# Altium PCB pcb_ttl_net_9120.PcbDoc
Units mil, origin at the board's own origin, x right, y up, seen from the top; angles counter-clockwise.
Board outline 1090 x 660 mil, 4 copper layers (Top Layer, GND02, PWR03, Bottom Layer), stack 23.756 mil thick; 24 components, 34 nets, 107 pads, 114 vias.
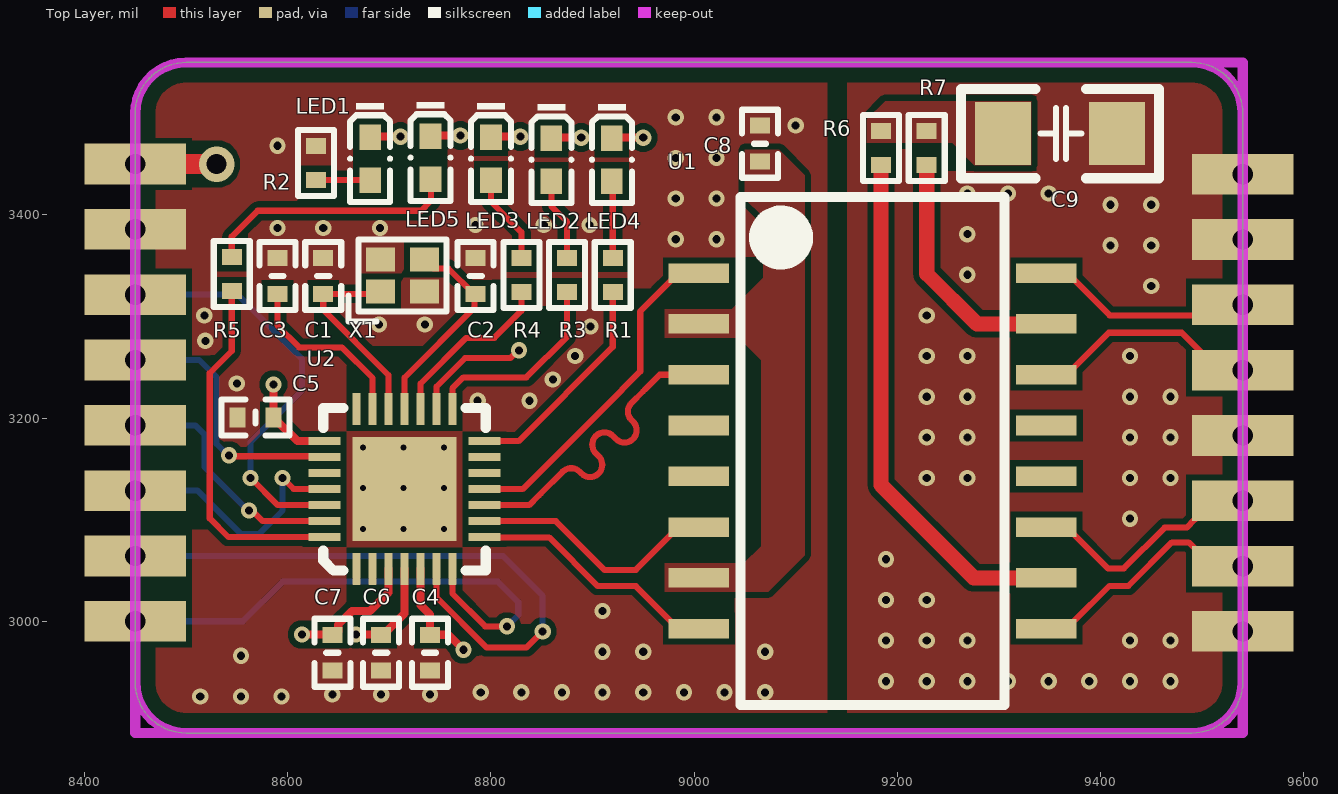
[diagram p0: Top Layer view]
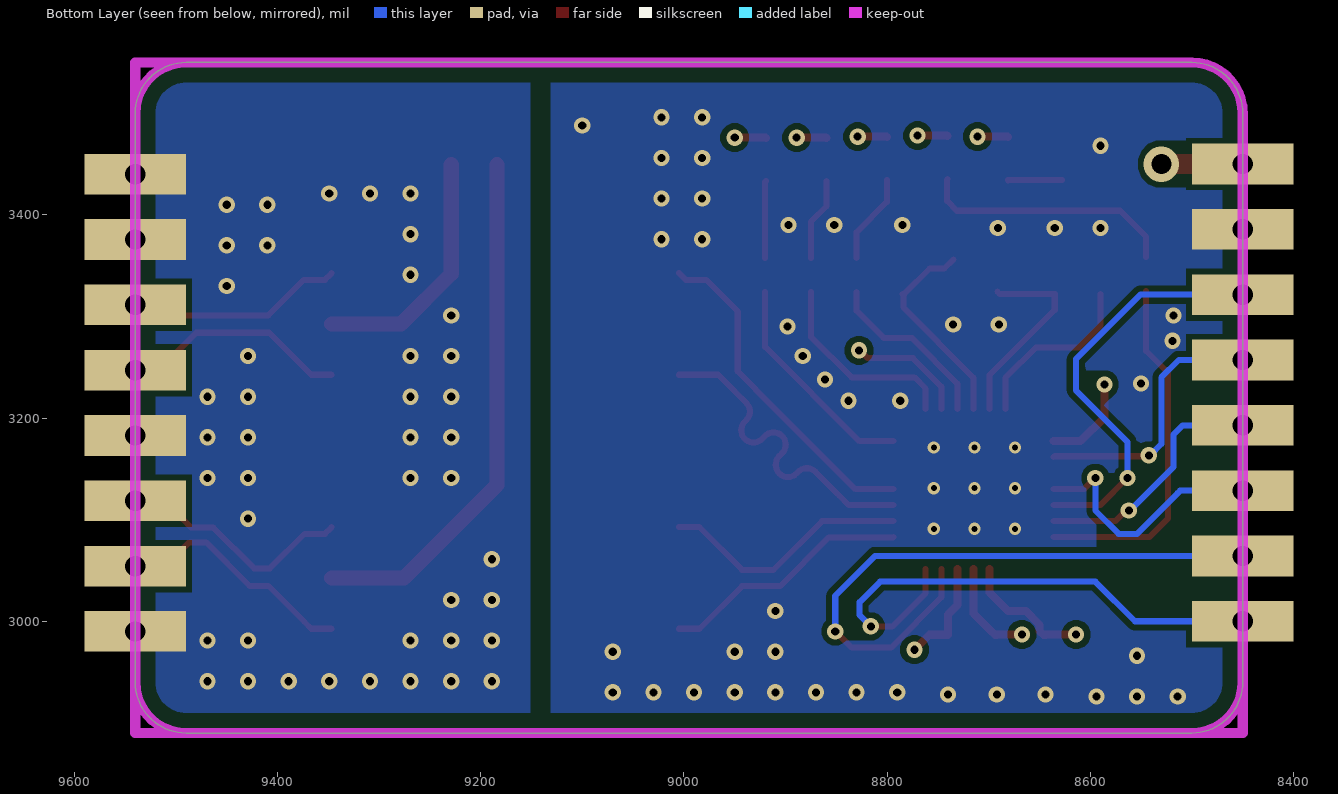
[diagram p1: Bottom Layer view, seen from below]
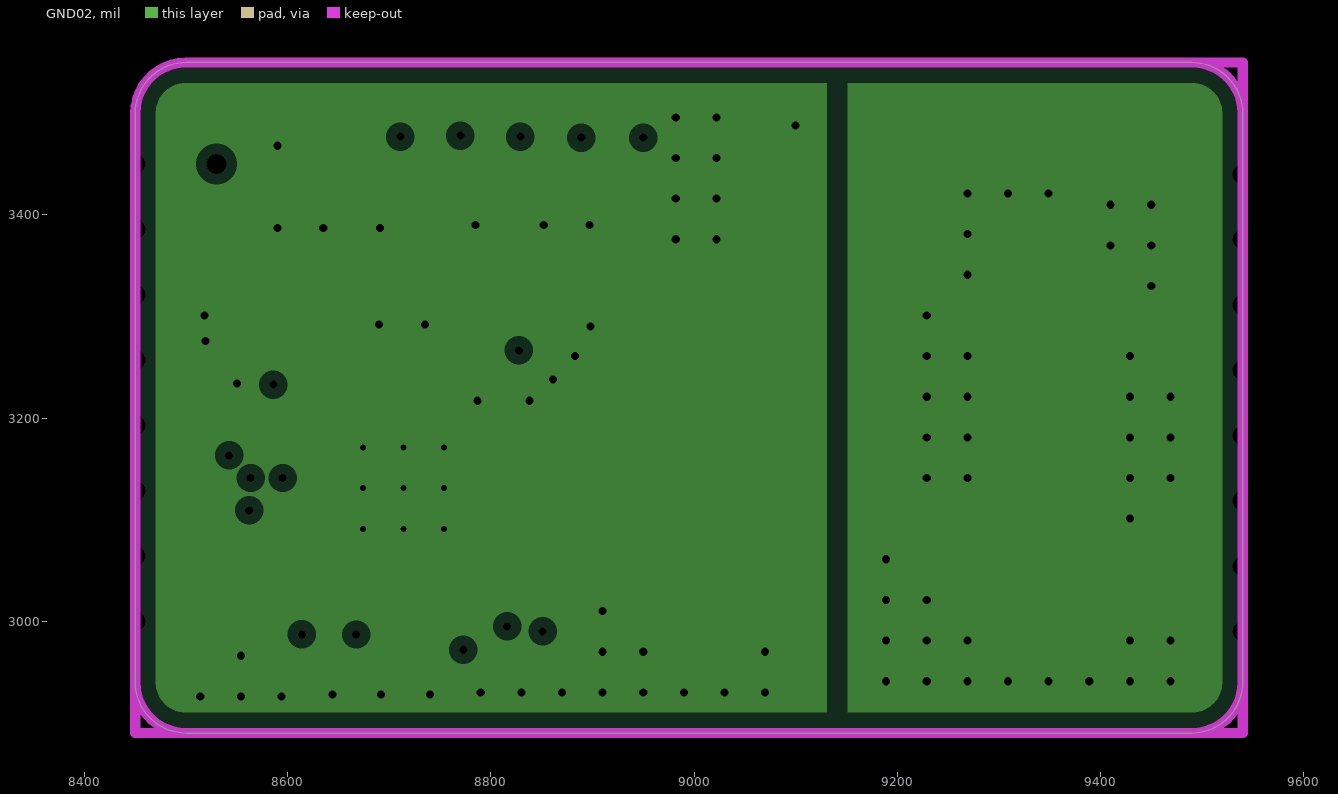
[diagram p2: GND02, clearances drawn from the general rule]
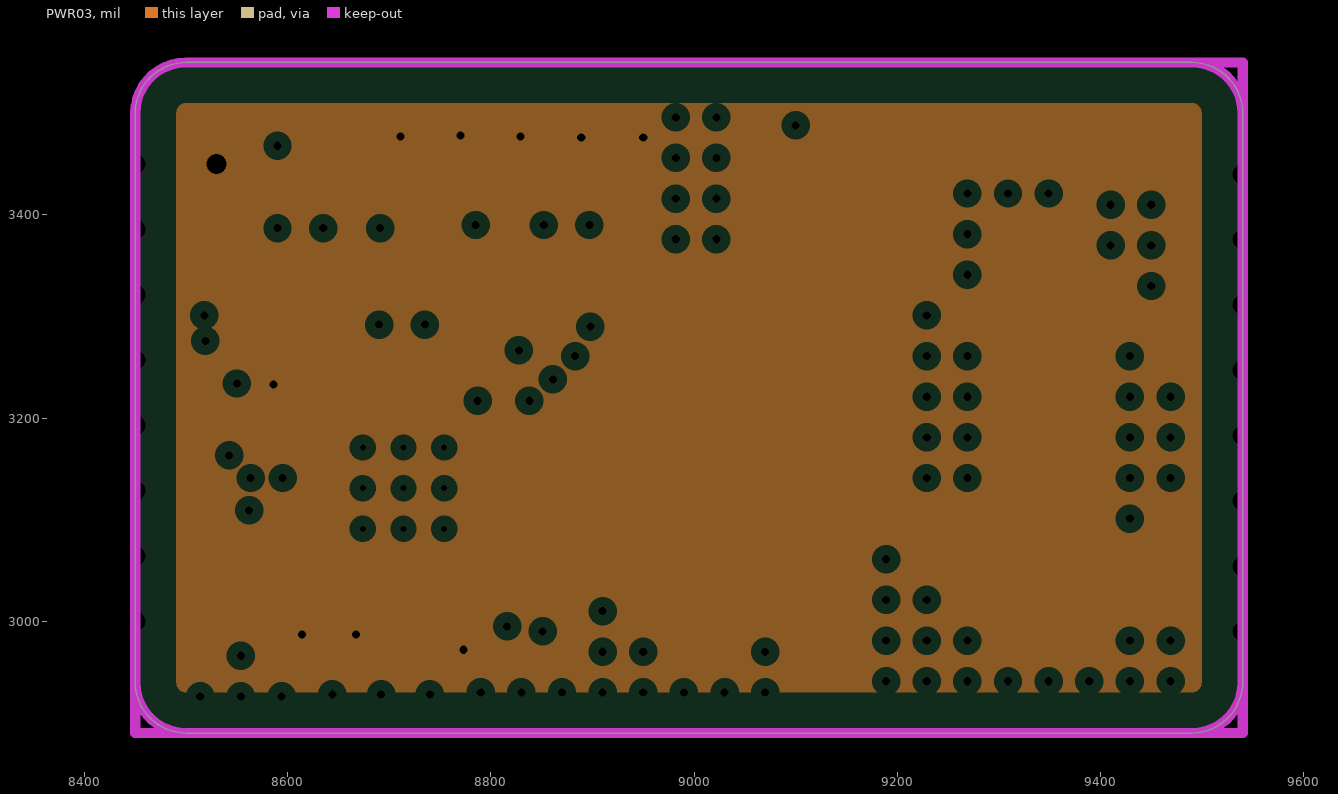
[diagram p3: PWR03, clearances drawn from the general rule]
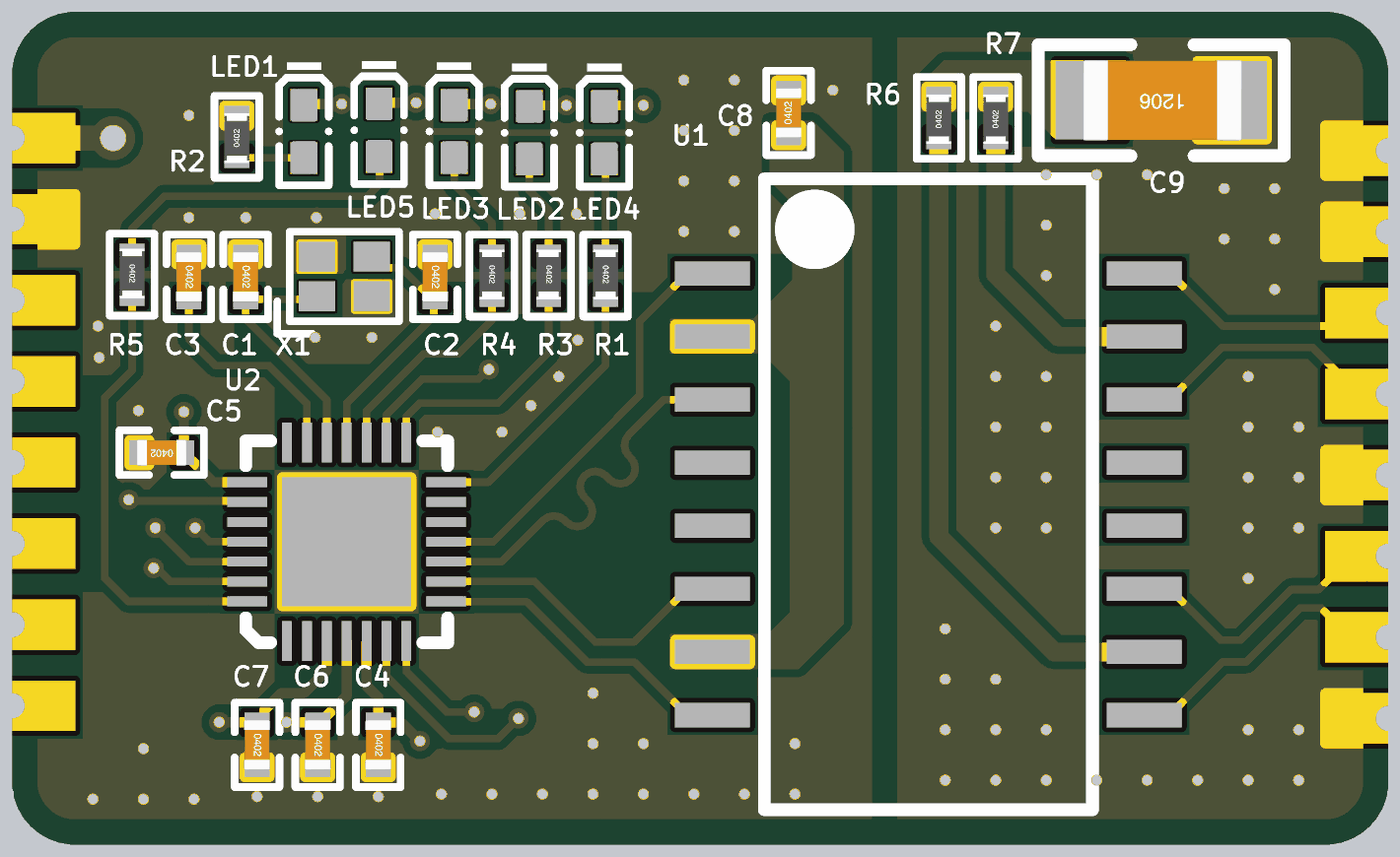
[diagram p4: 3D render of the assembled board from above, using the file's embedded part models]

## Layer stack, top to bottom
Top Solder: solder mask 0.4, Solder Resist, Dk 3.5
Top Layer: signal copper 1.4
Dielectric 2: prepreg 2.8, PP-006, Dk 4.1
GND02: plane copper 1.378, net GND
Dielectric 3: prepreg 2.8, PP-006, Dk 4.1
PWR03: plane copper 1.378, net 3V3
Dielectric 1: dielectric 12.6, FR-4, Dk 4.8
Bottom Layer: signal copper 1.4
Bottom Solder: solder mask 0.4, Solder Resist, Dk 3.5

## Board outline
8450,2940 8450,3500 cw(c8500,3500) 8500,3550 9490,3550 cw(c9490,3500) 9540,3500 9540,2940 cw(c9490,2940) 9490,2890 8500,2890 cw(c8500,2940)

## Design rules (kind name [scope] priority, off if disabled: settings)
Clearance [All] p1: gap=6 ignorepadtopadclearanceinfootprint=TRUE
DiffPairsRouting [All] p1: maxlimit=10 minlimit=8 mostfreqgap=8 toplayer_minwidth=1 toplayer_maxwidth=100 toplayer_prefwidth=4 bottomlayer_minwidth=1 bottomlayer_maxwidth=100 bottomlayer_prefwidth=4 maxuncoupledlength=500
PlaneClearance [All] p1: clearance=10
PlaneConnect [All] p1: planeconnectstyle=Direct reliefexpansion=20 reliefentries=4 reliefconductorwidth=10 reliefairgap=10
PolygonConnect [All] p1: connectstyle=Direct reliefconductorwidth=10 reliefentries=4 polygonreliefangle="90 Angle" airgapwidth=10
RoutingVias [All] p1: holewidth=8 width=16 viastyle="Through Hole" minholewidth=10 minwidth=10 maxholewidth=100 maxwidth=100
SilkToSilkClearance [All] p1: silktosilkclearance=4
SilkToSolderMaskClearance [IsPad] p1: minsilkscreentomaskgap=4 clearancetoexposedcopper=TRUE
SolderMaskExpansion [All] p1: expansion=4 istentingtop=FALSE
Width [All] p1: maxlimit=100 minlimit=1 preferedwidth=8
25 further rules are at their usual default settings.

## Classes and differential pairs
differential pair INF_ETH_TX: +INF_ETH_TX_P -INF_ETH_TX_N
differential pair INF_ETH_RX: +INF_ETH_RX_P -INF_ETH_RX_N
differential pair CH9120_TX: +CH9120_TX_P -CH9120_TX_N
differential pair CH9120_RX: +CH9120_RX_P -CH9120_RX_N

## Components (designator, comment, footprint, x,y, rotation, side; value= is the part's Value field where it differs from the comment)
C1 "12pF" "C 0402_L" 8635,3340 r270 top
C2 "12pF" "C 0402_L" 8785,3340 r270 top
C3 "1uF" "C 0402_L" 8590,3340 r270 top
C4 "2.2uF" "C 0402_L" 8740,2969 r270 top
C5 "104" "C 0402_L" 8568.46,3200.65 r180 top
C6 "104" "C 0402_L" 8692,2969 r270 top
C7 "104" "C 0402_L" 8644,2969 r270 top
C8 "0.01uF" "C 0402_L" 9065,3470 r90 top
C9 "104" "C 1206_L" 9361.09,3480 r180 top
LED1 "红色" LED-SMD_0402 8680,3455 r270 top
LED2 "红色" LED-SMD_0402 8858.5,3454 r270 top
LED3 "红色" LED-SMD_0402 8799,3455 r270 top
LED4 "红色" LED-SMD_0402 8918,3454 r270 top
LED5 "红色" LED-SMD_0402 8739.5,3456 r270 top
R1 "1K" "R 0402_L" 8920,3341.96 r270 top
R2 "1K" "R 0402_L" 8628,3450 r90 top
R3 "1K" "R 0402_L" 8875,3341.96 r270 top
R4 "1K" "R 0402_L" 8830,3341.96 r270 top
R5 "1K" "R 0402_L" 8545,3342.71 r270 top
R6 "1K" "R 0402_L" 9184,3465 r90 top
R7 "1K" "R 0402_L" 9229,3465 r90 top
U1 "H1601CE" XFMR-SMD_16P-L12.7-W6.8-P1.27-LS9.5 9205,3205 r270 top
U2 "CH9120" WQFN-28_L4.0-W4.0-P0.40-BL-EP 8715,3130 r0 top
X1 "XTAL" XTAL-SMD_4P-1612 8715,3340 r0 top

## Footprints (in the part's own frame and the unit in brackets; to place one, negate y for a bottom-side part, rotate by r counter-clockwise, add the part's x,y. Pads: shape width x height; smd on the part's side, far side on the other; paste and mask are expansions set on the pad)
"C 0402_L" [mm] "无极性贴片电容         淘宝ID:黄晶宝石"
  rect 0.4x0.5 smd: 1(-0.45,0) 2(0.45,0)
  silkscreen extent -0.85,-0.45 0.85,0.45, body extent -0.5,-0.26 0.5,0.26, height 0.53
"C 1206_L" [mil] "无极性贴片电容"
  rect 55x62 smd: 1(-55.12,0) 2(57.09,0)
  silkscreen extent -96,-44 98,44, body extent -63,-32 63,32, height 48
LED-SMD_0402 [mm]
  rect 0.636x0.54 smd paste-100 mask+0.051: 1(-0.545,0.029) 2(0.531,0.029)
  silkscreen extent -1.4,-0.51 1.08,0.57
"R 0402_L" [mm] "1/16W贴片电阻     淘宝ID:黄晶宝石"
  rect 0.4x0.5 smd: 1(-0.4,0) 2(0.45,0)
  silkscreen extent -0.8,-0.45 0.85,0.45, body extent -0.5,-0.25 0.5,0.25, height 0.3
WQFN-28_L4.0-W4.0-P0.40-BL-EP [mm]
  rect 0.2x0.8 smd: 1(-1.2,-2) 2(-0.8,-2) 3(-0.4,-2) 4(0,-2) 5(0.4,-2) 6(0.8,-2) 7(1.2,-2) 15(1.2,2) 16(0.8,2) 17(0.4,2) 18(0,2) 19(-0.4,2) 20(-0.8,2) 21(-1.2,2)
  rect 0.8x0.2 smd: 8(2,-1.2) 9(2,-0.8) 10(2,-0.4) 11(2,0) 12(2,0.4) 13(2,0.8) 14(2,1.2) 22(-2,1.2) 23(-2,0.8) 24(-2,0.4) 25(-2,0) 26(-2,-0.4) 27(-2,-0.8) 28(-2,-1.2)
  rect 2.6x2.6 smd: 29(0,0)
  silkscreen extent -2.03,-2.03 2.03,2.03
XFMR-SMD_16P-L12.7-W6.8-P1.27-LS9.5 [mm]
  rect 0.49x1.508 smd: 1(-3.496,-5.088) 2(-2.226,-5.088) 3(-0.956,-5.088) 4(0.314,-5.088) 5(1.584,-5.088) 6(2.854,-5.088) 7(4.124,-5.088) 8(5.394,-5.088) 9(5.394,3.6) 10(4.124,3.6) 11(2.854,3.6) 12(1.584,3.6) 13(0.314,3.6) 14(-0.956,3.6) 15(-2.226,3.6) 16(-3.496,3.6)
  silkscreen extent -5.4,-4.05 7.3,2.56
XTAL-SMD_4P-1612 [mm]
  rect 0.73x0.6 smd paste+0 mask+0.05: 1(-0.598,-0.393) 2(0.502,-0.393) 3(0.502,0.407) 4(-0.598,0.407)
  silkscreen extent -1.4,-1.14 1.05,0.91

## Part data
C1 C2 C3 C4 C5 C6 C7 C8 C9: library part C, "贴片电容", BOM名称=无极性贴片电容, 唯一出售店铺网址=https://shop463601444.taobao.com, 淘宝ID="封装库来自淘宝 ID：黄晶宝石", 联系售后，技术支持=https://shop463601444.taobao.com
LED1 LED2 LED3 LED4 LED5: library part LED-SMD, "贴片LED", BOM名称=贴片LED, 学习资源=https://item.taobao.com/item.htm?id=566775463719, 版权归属="封装库来自淘宝 ID：黄晶宝石"
R1 R2 R3 R4 R5 R6 R7: library part R, "贴片电阻", BOM名称=贴片电阻, 封装库来自淘宝卖家 ID：黄晶宝石=其他店铺购入均为盗版，不享受售后技术支持服务，请立即申请退款, 版权归属="来自淘宝 ID：黄晶宝石", 联系售后=https://item.taobao.com/item.htm?id=566775463719
U1: library part H1601CE_C206231751_H1601CE_C20623175, "网口变压器"
U2: library part WQFN-28_L4.0-W4.0-P0.40-BL-EP, "以太网收发器"
X1: library part XTAL-SMD_4P(2016), "无源晶振"

## Free pads (board coordinates)
  rect 100x40 hole 20: 1(8450,3450) 2(8450,3385.71) 3(8450,3321.43) 4(8450,3257.14) 5(8450,3192.86) 6(8450,3128.57) 7(8450,3064.29) 8(8450,3000) 9(9540,2990) 10(9540,3054.29) 11(9540,3118.57) 12(9540,3182.86) 13(9540,3247.14) 14(9540,3311.43) 15(9540,3375.71) 16(9540,3440)

## Via types
v1: diameter 16, hole 8, Top Layer to Bottom Layer, tented both sides, 104 vias
v2: diameter 12, hole 6, Top Layer to Bottom Layer, tented both sides, 9 vias
v3: diameter 35, hole 20, Top Layer to Bottom Layer, tented both sides, 1 vias

## Nets (pads, with @x,y where several pads share a name; then routed paths per layer and width w, separated by ;. In a path a pad name is that pad's centre, name@x,y a point inside that pad or via, vN(x,y) a via of type N, cw(c..) or ccw(c..) an arc to the next point about the centre after c; other vN are vias at no path point)
3V3: C4.1 C5.1 C6.1 C7.1 LED1.1 LED2.1 LED3.1 LED4.1 LED5.1 pad.1 U2.3 U2.4 U2.5 U2.22 | length 656.3
  Top Layer w8: v1(8586,3233) 8586.09,3232.91 8586.09,3200.73 8609.57,3177.25 U2.22 ; v1(8614,2987) 8614.14,2986.86 8643.86,2986.86 C7.1 8645.97,2986.72 8649.84,2990.59 8649.84,2996.59 8663.26,3010 8681,3010 8699.2,3028.2 8699.2,3051.2 U2.3 ; v1(8667.31,2986.95) 8667.43,2986.83 8691.88,2986.83 C6.1 ; LED1.1 8681.66,3477 v1(8711,3477) ; C6.1@8693.97,2986.72 8697.84,2990.59 8715,3007.75 U2.4 ; U2.5 8730.75,3015.84 8740,3006.59 C4.1 8758.28,2986.72 v1(8773,2972) ; LED5.1 8741.16,3478 v1(8770,3478) ; LED3.1 8800.66,3477 v1(8829,3477) ; LED2.1 8860.16,3476 v1(8889,3476) ; LED4.1 8919.66,3476 v1(8950,3476)
  Top Layer w20: pad.1 v3(8530,3450)
AGND: C9.1 pad.9 pad.12 pad.15 pad.16
  other v1: 9189,2941 9229,2941 9269,2941 9309,2941 9349,2941 9389,2941 9429,2941 9469,2941 9189,2981 9229,2981 9269,2981 9429,2981 9469,2981 9189,3021 9229,3021 9189,3061 9429,3101 9229,3141 9269,3141 9429,3141 9469,3141 9229,3181 9269,3181 9429,3181 9469,3181 9229,3221 9269,3221 9429,3221 9469,3221 9229,3261 9269,3261 9429,3261 9229,3301 9450,3330 9269,3341 9410,3370 9450,3370 9269,3381 9410,3410 9450,3410 9269,3421 9309,3421 9349,3421
CH9120_ACT: R1.2 U2.14 | length 218.9
  Top Layer w6: U2.14 8827.24,3177.24 8920,3270 R1.2
CH9120_CFG0: pad.3 U2.26 | length 412.4
  Top Layer w6: v1(8563.47,3141) 8590.22,3114.25 U2.26
  Bottom Layer w6: pad.3 8550.75,3321.43 8614.26,3257.92 8614.26,3227.26 8563.47,3176.47 v1(8563.47,3141)
CH9120_CFGEN: pad.4 U2.23 | length 264.3
  Top Layer w6: v1(8542.35,3163.32) 8543.26,3162.41 8635.35,3162.41 U2.23
  Bottom Layer w6: pad.4 8512.86,3257.14 8530,3240 8530,3174.44 8541.12,3163.32 v1(8542.35,3163.32)
CH9120_DIR: pad.6 U2.25 | length 249.7
  Top Layer w6: v1(8595,3141) 8605.76,3130.24 U2.25@8636.02,3130.24
  Bottom Layer w6: pad.6 8511.43,3128.57 8513.98,3126.02 8546.76,3093.24 8546.76,3093.09 8553.86,3086 8572,3086 8595,3109 v1(8595,3141)
CH9120_LINK: R3.2 U2.15 | length 198.6
  Top Layer w6: U2.15 8762.2,3208.79 8762.2,3229.2 8773,3240 8835,3240 8875,3280 R3.2
CH9120_RSET: pad.5 U2.27 | length 244.1
  Top Layer w6: v1(8562.07,3109.12) 8564.77,3109.12 8575.39,3098.5 U2.27
  Bottom Layer w6: pad.5 8509.14,3192.86 8518,3184 8518,3152 8560.88,3109.12 v1(8562.07,3109.12)
CH9120_RSTI: U2.16 | length 118.1
  Top Layer w6: U2.16 8746.5,3230.88 8774.55,3258.93 8819.1,3258.93 8826.79,3266.62 v1(8827.61,3266.62)
CH9120_RUN: R4.2 U2.17 | length 172.8
  Top Layer w6: U2.17 8730.75,3233.89 8775.74,3278.88 8803.3,3278.88 8830,3305.57 R4.2
CH9120_RX_N: U1.8 U2.8 | length 248.3
  Top Layer w6: U2.8 8794,3082.5 8857.31,3082.5 8905.17,3034.64 8942.65,3034.64 8984.65,2992.64 U1.8
CH9120_RX_P: U1.6 U2.9 | length 248.2
  Top Layer w6: U2.9 8863.94,3098.5 8911.8,3050.64 8942.65,3050.64 8984.65,3092.64 U1.6
CH9120_RXD: pad.7 U2.6 | length 611.7
  Top Layer w6: U2.6 8746.5,3023.5 8796,2974 8835,2974 v1(8851,2990)
  Bottom Layer w6: pad.7 8811.71,3064.29 8851,3025 v1(8851,2990)
CH9120_TX_N: U1.3 U2.10 | length 331.2
  Top Layer w6: U2.10 8837.7,3114.25 8847.24,3123.79 8849.36,3125.91 8870.6,3147.11 cw(c8879.08,3138.62) 8887.56,3147.1 8889.14,3145.52 ccw(c8897.63,3154.01) 8906.11,3145.52 ccw(c8897.63,3154.01) 8906.11,3162.49 8903.28,3165.33 cw(c8911.76,3173.82) 8903.28,3182.3 cw(c8911.76,3173.82) 8920.25,3182.3 8923.06,3179.49 ccw(c8931.55,3187.97) 8940.03,3179.49 ccw(c8931.55,3187.97) 8940.03,3196.46 8938.53,3197.96 cw(c8947.01,3206.45) 8938.54,3214.94 8949.74,3226.13 8951.87,3228.25 8966.27,3242.64 U1.3
CH9120_TX_P: U1.1 U2.11 | length 333.7
  Top Layer w6: U2.11 8831.18,3130 8929.19,3228.02 8929.19,3228.19 8947,3246 8947,3305 8977.99,3335.99 8998.04,3335.99 U1.1
CH9120_TXD: pad.8 U2.7 | length 521
  Top Layer w6: U2.7 8762.25,3027.25 8794.5,2995 v1(8816,2995)
  Bottom Layer w6: pad.8 8556,3000 8595,3039 8806.83,3039 8827,3018.83 8827,3006 v1(8816,2995)
CH9120_TXPCS: R5.2 U2.28 | length 353.3
  Top Layer w6: R5.2 8545,3266 8523.33,3244.33 8523.33,3101.22 8541.79,3082.76 U2.28
CH9120_XI: C1.2 U2.19 X1.1 | length 197.6
  Top Layer w6: X1.1 8689.22,3322.29 C1.2 8635,3306.5 8699.26,3242.24 U2.19
CH9120_XO: C2.2 U2.18 X1.3 | length 204.8
  Top Layer w6: U2.18 8715,3239.89 8784.04,3308.93 8784.04,3321.33 C2.2 ; X1.3 8743.59,3347.22 8758.1,3347.22 C2.2@8783.03,3322.29
GND: C1.1 C2.1 C3.1 C4.2 C5.2 C6.2 C7.2 C8.2 pad.2 R2.2 U2.29 X1.2 X1.4
  other v1: 8514,2926 8554,2926 8594,2926 8644,2928 8692,2928 8740,2928 8790,2930 8830,2930 8870,2930 8910,2930 8950,2930 8990,2930 9030,2930 9070,2930 8554,2966 8910,2970 8950,2970 9070,2970 8910,3010 8787,3217 8838,3217 8550,3234 8861,3238 8883,3261 8519,3276 8898,3290 8690,3292 8735,3292 8518,3301 8982,3376 9022,3376 8590,3387 8635,3387 8691,3387 8785,3390 8852,3390 8897,3390 8982,3416 9022,3416 8982,3456 9022,3456 8590,3468 9100,3488 8982,3496 9022,3496
  other v2: 8674,3091 8714,3091 8754,3091 8674,3131 8714,3131 8754,3131 8674,3171 8714,3171 8754,3171
INF_ETH_RX_N: pad.10 U1.9 | length 238.2
  Top Layer w6: U1.9 9366.76,2992.64 9373.41,2999.28 9373.41,2999.41 9408.72,3034.72 9427.36,3034.72 9470.25,3077.6 9486.68,3077.6 9510,3054.29 pad.10
INF_ETH_RX_P: pad.11 U1.11 | length 238.4
  Top Layer w6: U1.11 9353.37,3085.99 9373.41,3085.99 9407.4,3052 9423.05,3052 9463.25,3092.19 9484.92,3092.19 9493,3100.27 9493,3101.57 9523,3101.57 pad.11
INF_ETH_TX_N: pad.13 U1.14 | length 225.7
  Top Layer w6: U1.14 9366.76,3242.64 9408.13,3284 9480,3284 9511,3253 9534.14,3253 pad.13
INF_ETH_TX_P: pad.14 U1.16 | length 214.8
  Top Layer w6: U1.16 9353.37,3335.99 9374.01,3335.99 9409,3301 9502,3301 9512.43,3311.43 pad.14
NetC3_2: C3.2 U2.20 | length 176.9
  Top Layer w6: C3.2 8590,3291 8611.39,3269.61 8653.39,3269.61 8683.51,3239.49 U2.20
NetC8_1: C8.1 U1.2 U1.7
NetC9_2: C9.2 R6.2 R7.2
NetLED1_1: LED1.2 R2.1 | length 53.2
  Top Layer w6: R2.1 8680.97,3434.25 LED1.2
NetLED2_2: LED2.2 R3.1 | length 81.7
  Top Layer w6: LED2.2 8859.63,3408.37 8875,3393 R3.1
NetLED3_2: LED3.2 R4.1 | length 88.7
  Top Layer w6: LED3.2 8800.13,3412.87 8830,3383 R4.1
NetLED4_2: LED4.2 R1.1 | length 75.7
  Top Layer w6: LED4.2 8920,3432.22 R1.1
NetLED5_2: LED5.2 R5.1 | length 252.2
  Top Layer w6: R5.1 8545,3378.51 8570.49,3404 8731.34,3404 8741,3413.66 8741,3434.72 LED5.2
NetR6_1: R6.1 U1.10 | length 515.8
  Top Layer w15: R6.1 9184,3134 9275.36,3042.64 U1.10
NetR7_1: R7.1 U1.15 | length 245.4
  Top Layer w15: R7.1 9229,3342 9278.36,3292.64 U1.15
pads on no net: U1.4 U1.5 U1.12 U1.13 U2.1 U2.2 U2.12 U2.13 U2.21 U2.24

## Polygon pours and split planes (outlines as drawn)
AGND on Top Layer "AGND_L01_P007" (solid, remove dead copper, pour order 7): 9151,3530 9151,2910 9490,2910 ccw(c9490,2940) 9520,2940 9520,3500 ccw(c9490,3500) 9490,3530
GND on Top Layer "GND_L01_P006" (solid, remove dead copper, pour order 6): 8470,3500 cw(c8500,3500) 8500,3530 9131,3530 9131,2910 8500,2910 cw(c8500,2940) 8470,2940
NetC9_2 on Top Layer "NETC9_2_L01_P001" (solid, pour order 1): 9332,3449 9332,3512 9188,3512 9170,3494 9170,3471 9254,3471 9276,3449 9280,3449
NetC8_1 on Top Layer "NETC8_1_L01_P000" (solid, pour order 0): 8971,3307 8971,3279 9044,3279 9066,3257 9066,3074 9049,3057 8971,3057 8971,3029 9073,3029 9109,3065 9109,3439 9084,3464 9050,3464 9050,3416 9068,3398 9068,3338 9037,3307
GND on Bottom Layer "GND_L04_P004" (solid, remove dead copper, pour order 4): 8470,3500 cw(c8500,3500) 8500,3530 9131,3530 9131,2910 8500,2910 cw(c8500,2940) 8470,2940
AGND on Bottom Layer "AGND_L04_P005" (solid, remove dead copper, pour order 5): 9151,3530 9151,2910 9490,2910 ccw(c9490,2940) 9520,2940 9520,3500 ccw(c9490,3500) 9490,3530
3V3 on PWR03 (split plane): 9492.58,3509.65 9494.99,3508.65 9497.06,3507.06 9498.65,3504.99 9499.65,3502.58 9499.94,3500.36 9499.91,3500 9499.91,2940 9499.94,2939.64 9499.65,2937.42 9498.65,2935.01 9497.06,2932.94 9494.99,2931.35 9492.58,2930.35 9490.36,2930.06 9490,2930.09 8500,2930.09 8499.64,2930.06 8497.42,2930.35 8495.01,2931.35 8492.94,2932.94 8491.35,2935.01 8490.35,2937.42 8490.06,2939.64 8490.09,2940 8490.09,3500 8490.06,3500.36 8490.35,3502.58 8491.35,3504.99 8492.94,3507.06 8495.01,3508.65 8497.42,3509.65 8499.64,3509.94 8500,3509.91 9490,3509.91 9490.36,3509.94
GND on GND02 (split plane): 8500,3529.9 9130.91,3529.9 9130.91,2910.1 8500,2910.1 8499.5,2910.05 8495.31,2910.38 8490.73,2911.48 8486.38,2913.28 8482.37,2915.74 8478.79,2918.79 8475.74,2922.37 8473.28,2926.38 8471.48,2930.73 8470.38,2935.31 8470.05,2939.5 8470.1,2940 8470.1,3500 8470.05,3500.5 8470.38,3504.69 8471.48,3509.27 8473.28,3513.62 8475.74,3517.63 8478.79,3521.21 8482.37,3524.26 8486.38,3526.72 8490.73,3528.52 8495.31,3529.62 8499.5,3529.95
AGND on GND02 (split plane): 9494.69,3529.62 9499.27,3528.52 9503.62,3526.72 9507.63,3524.26 9511.21,3521.21 9514.26,3517.63 9516.72,3513.62 9518.52,3509.27 9519.62,3504.69 9519.95,3500.5 9519.9,3500 9519.9,2940 9519.95,2939.5 9519.62,2935.31 9518.52,2930.73 9516.72,2926.38 9514.26,2922.37 9511.21,2918.79 9507.63,2915.74 9503.62,2913.28 9499.27,2911.48 9494.69,2910.38 9490.5,2910.05 9490,2910.1 9151.09,2910.1 9151.09,3529.9 9490,3529.9 9490.5,3529.95

## Keep-outs
Keep-Out Layer:
  lines w10: 8450,2940 ccw(c8500,2940) 8500,2890 ; 8450,2940 8450,2890 8500,2890 ; 8450,2940 8450,3250 8450,3500 cw(c8500,3500) 8500,3550 9490,3550 ; 8500,2890 9490,2890 ; 9490,2890 ccw(c9490,2940) 9540,2940 ; 9490,2890 9540,2890 9540,2940 ; 9490,3550 cw(c9490,3500) 9540,3500 ; 9490,3550 9540,3550 9540,3500 ; 9540,2940 9540,3355 9540,3500

## Other copper
Top Layer:
  pour cut-out: 8534.67,3426.5 8506,3426.5 8506,3433.69
  pour cut-out: 8525.33,3473.5 8506,3473.5 8506,3466.31
  pour cut-out: 8572.3,3184.81 8558.93,3171.44 8558.93,3169.84
  pour cut-out: 9311.04,3306.4 9311.04,3326.99 9321.99,3326.99 9322,3327
  pour cut-out: 9270.5,3443 9248,3443 cw(c9248,3449) 9242,3449
  pour cut-out: 9311.04,3026.99 9311.04,3008.28 ccw(c9313.32,3008.28) 9313.32,3006 9327,3006
  pour cut-out: 9311.04,3076.99 9311.04,3056.4 cw(c9313.64,3056.4) 9313.64,3059 9324,3059
  pour cut-out: 9311.04,3258.28 9311.04,3276.99 9329.01,3276.99 9332,3274
  pour cut-out: 8800.84,3336.16 8814.2,3336.16 8815.18,3335.18
  pour cut-out: 9040.37,3358.28 9040.4,3358.25 9062.57,3358.25 9062.57,3355.57 9061,3354
  pour cut-out: 8936,3328 8957,3328 8958,3327
  pour cut-out: 8657.82,3029.51 8657.82,3019.62 8659.98,3017.47
  pour cut-out: 9040.37,3008.28 9040,3008.65 9040,3024 9027,3024 9022,3029
  pour cut-out: 8845.84,3310.37 8859.15,3310.37 8859.15,3304.85 8862,3302
  pour cut-out: 8684,3271 8733,3271 8734,3270
  pour cut-out: 8625.82,3308.41 8625.82,3278.37 8627.55,3276.63
  pour cut-out: 8560.84,3372.34 8560.84,3382.81 8560.22,3383.43
  pour cut-out: 8664.5,3452.62 8664.5,3457.94 8680.94,3457.94 8681,3458
  pour cut-out: 8757.26,3453.62 8757.26,3458.94 8746.06,3458.94 8746,3459
  pour cut-out: 8612.16,3420.37 8612.16,3413.84 8615,3411
  pour cut-out: 8611.22,3001 8640.08,3001 8640.49,3000.59 8637.54,2997.64 8623.16,2997.64
  pour cut-out: 8628.16,2972.84 8628,2973 8611.22,2973 8614.14,2975.93 8628.16,2975.93
  pour cut-out: 8839.13,2997.93 8838.99,2997.78 8830,2997.78 8830,2992.22
  pour cut-out: 8657.82,3230.49 8657.82,3251.82 8659,3253
  pour cut-out: 8506,3026 8506,3038.29 8505.71,3038 8491,3038
  pour cut-out: 8502.82,3090.29 8536.29,3090.29 8537,3091
  pour cut-out: 8506,3295.43 8506,3281 8498,3273
  pour cut-out: 8504.73,3262 8528,3262 8523,3257
Bottom Layer:
  pour cut-out: 8534.67,3426.5 8506,3426.5 8506,3434.23
  pour cut-out: 8525.33,3473.5 8506,3473.5 8506,3465.77
  pour cut-out: 8583.22,3247 8603.56,3247 cw(c8603.56,3244.78) 8605.77,3244.78
  pour cut-out: 8594.18,3099 8594.18,3073.18 8593,3072
  pour cut-out: 8818.78,2981 8840.41,2981 8842.24,2982.82
  pour cut-out: 8574.13,3225.07 8585.71,3213.49 8591.13,3213.49
GND02 (plane layer: these items are gaps in the copper):
  lines w20: 9141,2890 9141,3540 cw(c9151,3540) 9151,3550 ; 9153,2891 ccw(c9154,2891) 9154,2890